# Altium PCB FPV0-3.PcbDoc (part 5 of 6)
Units mm, origin at the board's own origin, x right, y up, seen from the top; angles counter-clockwise.
Board outline 81.28 x 53.34 mm, 4 copper layers (Top Layer, GND Plane 1, 3v3 Plane 2, Bottom Layer); 178 components, 250 nets, 836 pads, 217 vias.
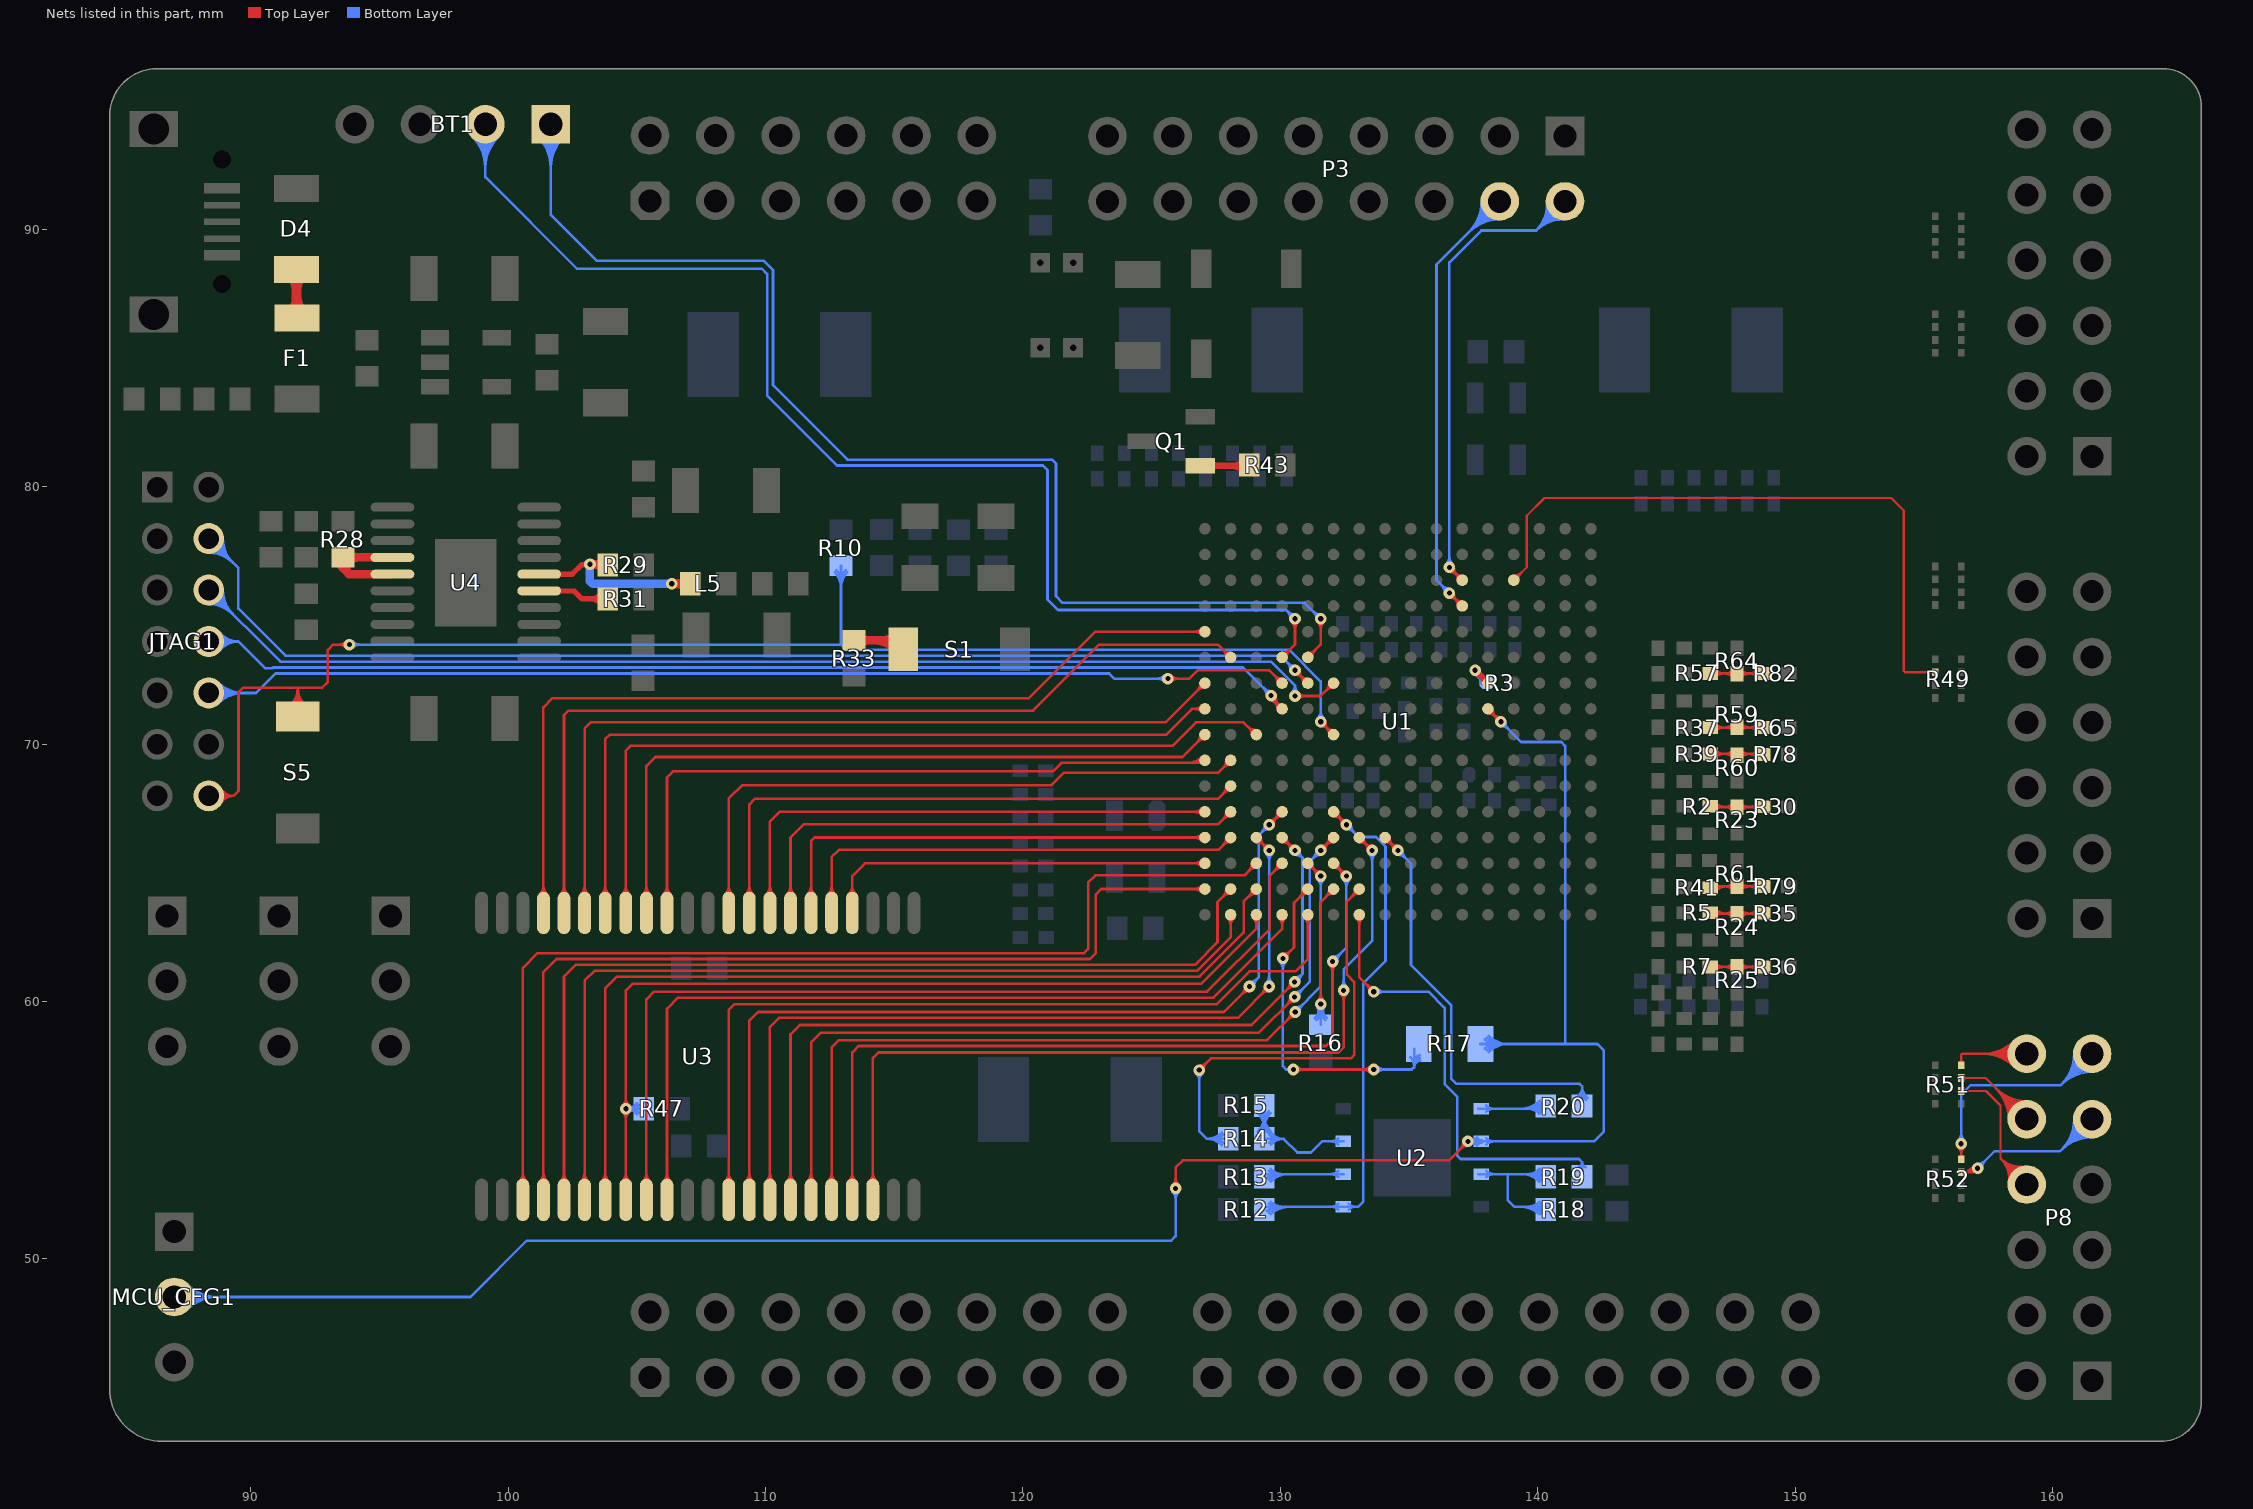
[diagram p7: the nets of this part, all layers, seen from the top]

## Via types
v1: diameter 0.45, hole 0.2, Top Layer to Bottom Layer, tented both sides, 150 vias
v2: diameter 0.55, hole 0.3, Top Layer to Bottom Layer, tented both sides, 55 vias
v3: diameter 0.45, hole 0.2, Top Layer to Bottom Layer, 6 vias
v4: diameter 0.666, hole 0.4, Top Layer to Bottom Layer, tented both sides, 4 vias
v5: diameter 0.513, hole 0.3, Top Layer to Bottom Layer, tented both sides, 1 vias
v6: diameter 0.55, hole 0.23, Top Layer to Bottom Layer, tented both sides, 1 vias

## Nets (pads, with @x,y where several pads share a name; then routed paths per layer and width w, separated by ;. In a path a pad name is that pad's centre, name@x,y a point inside that pad or via, vN(x,y) a via of type N, cw(c..) or ccw(c..) an arc to the next point about the centre after c; other vN are vias at no path point) (continued)
NetP8_8: P8.8 R51.3 | length 12.1
  Top Layer w0.089: R51.3@156.456,56.519 157.425,56.519 157.988,55.956 157.988,53.899 ; R51.3@156.513,56.462 cw(c156.65,56.325) 156.65,56.519 cw(c156.65,56.713) R51.3@156.513,56.576 ; P8.8@158.304,52.973 ccw(c157.203,53.114) 157.988,53.899 ; P8.8@158.392,52.961 ccw(c157.43,53.085) 158.116,53.771 ccw(c158.802,54.457) P8.8@158.926,53.494 ; P8.8@158.481,52.95 ccw(c157.657,53.056) 158.244,53.643 ccw(c158.831,54.23) P8.8@158.937,53.406 ; P8.8@158.569,52.939 ccw(c157.884,53.026) 158.372,53.515 ccw(c158.86,54.003) P8.8@158.948,53.318 ; P8.8@158.914,53.583 cw(c158.773,54.684) 157.988,53.899 ; P8.8@159.004,52.883 157.988,53.899
NetP8_9: P8.9 R52.5 | length 18.3
  Top Layer w0.089: R52.5@156.513,53.304 cw(c156.65,53.167) 156.65,53.361 cw(c156.65,53.556) R52.5@156.513,53.418 ; 156.625,53.361 ccw(c156.625,53.84) v1@157.019,53.57 ; 156.793,53.361 ccw(c156.793,53.724) v1@157.093,53.519 ; v1@156.946,53.62 cw(c156.456,53.955) R52.5@156.456,53.361 156.939,53.361 v1(157.095,53.518)
  Bottom Layer w0.089: v1(157.095,53.518) 157.755,54.178 160.299,54.178 P8.9@161.544,55.423 ; v1@157.095,53.698 ccw(c157.095,54.134) 157.403,53.826 ccw(c157.711,53.518) v1@157.276,53.518 ; P8.9@160.838,55.423 cw(c159.135,55.423) 160.34,54.218 cw(c161.544,53.014) P8.9@161.544,54.717 ; P8.9@160.927,55.423 cw(c159.439,55.423) 160.491,54.37 cw(c161.544,53.317) P8.9@161.544,54.806 ; P8.9@161.016,55.423 cw(c159.742,55.423) 160.643,54.522 cw(c161.544,53.621) P8.9@161.544,54.895 ; P8.9@161.105,55.423 cw(c160.046,55.423) 160.795,54.674 cw(c161.544,53.924) P8.9@161.544,54.984 ; P8.9@161.194,55.423 cw(c160.349,55.423) 160.947,54.825 cw(c161.544,54.228) P8.9@161.544,55.073
NetP8_10: P8.10 R51.5 | length 13.5
  Top Layer w0.089: R51.5@156.456,57.019 157.408,57.019 P8.10@159.004,55.423 ; R51.5@156.513,56.962 cw(c156.65,56.825) 156.65,57.019 cw(c156.65,57.213) R51.5@156.513,57.076 ; P8.10@158.298,55.423 ccw(c156.595,55.423) 157.8,56.627 ccw(c159.004,57.832) P8.10@159.004,56.128 ; P8.10@158.387,55.423 ccw(c156.899,55.423) 157.951,56.475 ccw(c159.004,57.528) P8.10@159.004,56.039 ; P8.10@158.476,55.423 ccw(c157.202,55.423) 158.103,56.324 ccw(c159.004,57.225) P8.10@159.004,55.951 ; P8.10@158.565,55.423 ccw(c157.506,55.423) 158.255,56.172 ccw(c159.004,56.921) P8.10@159.004,55.862 ; P8.10@158.654,55.423 ccw(c157.809,55.423) 158.407,56.02 ccw(c159.004,56.618) P8.10@159.004,55.773
NetP8_11: P8.11 R52.7 | length 19.9
  Top Layer w0.089: v1@156.328,54.338 cw(c156.02,54.03) 156.456,54.03 cw(c156.892,54.03) v1@156.584,54.338 ; R52.7@156.399,53.943 ccw(c156.262,54.081) 156.456,54.081 ccw(c156.65,54.081) R52.7@156.513,53.943 ; R52.7@156.456,53.861 v1(156.456,54.466)
  Bottom Layer w0.089: v1@156.328,54.593 ccw(c156.02,54.901) 156.456,54.901 ccw(c156.892,54.901) v1@156.584,54.593 ; v1(156.456,54.466) 156.456,56.38 156.82,56.744 160.325,56.744 P8.11@161.544,57.963 ; P8.11@160.838,57.963 cw(c159.135,57.963) 160.34,56.758 cw(c161.544,55.554) P8.11@161.544,57.257 ; P8.11@160.927,57.963 cw(c159.439,57.963) 160.491,56.91 cw(c161.544,55.857) P8.11@161.544,57.346 ; P8.11@161.016,57.963 cw(c159.742,57.963) 160.643,57.062 cw(c161.544,56.161) P8.11@161.544,57.435 ; P8.11@161.105,57.963 cw(c160.046,57.963) 160.795,57.214 cw(c161.544,56.464) P8.11@161.544,57.524 ; P8.11@161.194,57.963 cw(c160.349,57.963) 160.947,57.365 cw(c161.544,56.768) P8.11@161.544,57.613
NetP8_12: P8.12 R51.7 | length 13.3
  Top Layer w0.089: R51.7@156.399,57.601 ccw(c156.262,57.738) 156.456,57.738 ccw(c156.65,57.738) R51.7@156.513,57.601 ; R51.7@156.456,57.519 156.456,57.929 156.489,57.963 P8.12@159.004,57.963 ; P8.12@158.505,57.464 ccw(c157.301,56.259) 157.301,57.963 ccw(c157.301,59.666) P8.12@158.505,58.462 ; P8.12@158.568,57.527 ccw(c157.515,56.474) 157.515,57.963 ccw(c157.515,59.452) P8.12@158.568,58.399 ; P8.12@158.631,57.59 ccw(c157.73,56.689) 157.73,57.963 ccw(c157.73,59.237) P8.12@158.631,58.336 ; P8.12@158.694,57.652 ccw(c157.945,56.903) 157.945,57.963 ccw(c157.945,59.022) P8.12@158.694,58.273 ; P8.12@158.757,57.715 ccw(c158.159,57.118) 158.159,57.963 ccw(c158.159,58.808) P8.12@158.757,58.21
NetQ1_2: Q1.3 R43.1 | length 3.6
  Top Layer w0.254: Q1.3@126.88,80.813 R43.1@128.754,80.813 ; Q1.3@127.278,80.69 cw(c127.573,80.395) 127.573,80.813 cw(c127.573,81.23) Q1.3@127.278,80.935 ; 128.095,80.813 cw(c128.095,80.104) R43.1@128.596,80.605 ; 128.165,80.813 ccw(c128.165,81.423) R43.1@128.596,80.991
NetR2_2: R2.2 R23.2 R30.2 | length 5.5
  Top Layer w0.102: R2.2@146.736,67.548 R23.2@147.752,67.548 R30.2@148.75,67.548 ; R2.2@146.821,67.65 ccw(c147.069,67.898) 147.069,67.548 ; R2.2@146.893,67.441 cw(c147.153,67.181) 147.153,67.548 ; R2.2@146.893,67.722 ccw(c147.314,68.143) 147.314,67.548 ; R23.2@147.611,67.407 ccw(c147.271,67.067) 147.271,67.548 ccw(c147.271,68.029) R23.2@147.611,67.689 ; R23.2@147.893,67.407 cw(c148.233,67.067) 148.233,67.548 cw(c148.233,68.029) R23.2@147.893,67.689 ; 148.181,67.548 ccw(c148.181,68.084) R30.2@148.56,67.705 ; 148.258,67.548 cw(c148.258,67.122) R30.2@148.56,67.423 ; 148.426,67.548 ccw(c148.426,67.838) R30.2@148.631,67.633
NetR3_2: R3.2 U1.E7 | length 3
  Top Layer w0.254: v1@137.569,72.768 cw(c137.569,72.531) 137.736,72.699 cw(c137.904,72.866) v1@137.667,72.866 ; v1(137.569,72.866) U1.E7@138.069,72.366 ; U1.E7@137.971,72.366 ccw(c137.735,72.366) 137.902,72.533 ccw(c138.069,72.701) U1.E7@138.069,72.464
  Bottom Layer w0.254: v1@137.544,72.771 cw(c137.434,72.363) R3.2@137.8,72.574 ; v1(137.569,72.866) 137.569,72.853 R3.2@138.032,72.39 ; v1@137.667,72.866 ccw(c137.936,72.866) 137.746,72.676 ; 137.736,72.685 cw(c137.441,72.39) R3.2@137.859,72.39
NetR5_2: R5.2 R24.2 R35.2 | length 5.5
  Top Layer w0.102: R5.2@146.739,63.409 R24.2@147.752,63.409 R35.2@148.75,63.409 ; R5.2@146.821,63.515 ccw(c147.077,63.771) 147.077,63.409 ; R5.2@146.893,63.305 cw(c147.145,63.054) 147.145,63.409 ; R5.2@146.893,63.587 ccw(c147.322,64.016) 147.322,63.409 ; R24.2@147.611,63.269 ccw(c147.271,62.929) 147.271,63.409 ccw(c147.271,63.89) R24.2@147.611,63.55 ; R24.2@147.893,63.269 cw(c148.233,62.929) 148.233,63.409 cw(c148.233,63.89) R24.2@147.893,63.55 ; 148.185,63.409 ccw(c148.185,63.939) R35.2@148.56,63.565 ; 148.254,63.409 cw(c148.254,62.978) R35.2@148.56,63.283 ; 148.43,63.409 ccw(c148.43,63.694) R35.2@148.631,63.493
NetR7_2: R7.2 R25.2 R36.2 | length 5.1
  Top Layer w0.102: R7.2@146.702,61.341 R25.2@147.752,61.341 R36.2@148.742,61.341 ; R7.2@146.893,61.2 cw(c147.233,60.86) 147.233,61.341 cw(c147.233,61.822) R7.2@146.893,61.482 ; R25.2@147.611,61.2 ccw(c147.271,60.86) 147.271,61.341 ccw(c147.271,61.822) R25.2@147.611,61.482 ; R25.2@147.893,61.2 cw(c148.233,60.86) 148.233,61.341 cw(c148.233,61.822) R25.2@147.893,61.482 ; R36.2@148.56,61.2 ccw(c148.219,60.86) 148.219,61.341 ccw(c148.219,61.822) R36.2@148.56,61.482
NetR13_1: R13.1 U2.2 | length 6.4
  Bottom Layer w0.102: R13.1@129.376,53.289 U2.2@132.453,53.289 ; R13.1@129.48,53.134 cw(c129.853,52.761) 129.853,53.289 ; R13.1@129.551,53.063 cw(c130.099,52.515) 130.099,53.289 ; R13.1@129.551,53.413 ccw(c129.85,53.711) 129.85,53.289 ; R13.1@129.623,52.991 cw(c130.344,52.27) 130.344,53.289 ; R13.1@129.623,53.485 ccw(c130.095,53.956) 130.095,53.289 ; 131.957,53.289 cw(c131.957,52.869) U2.2@132.255,53.166 ; 131.957,53.289 ccw(c131.957,53.71) U2.2@132.255,53.412
NetR14_1: R14.1 R15.2 U2.3 | length 13.4
  Bottom Layer w0.102: R14.1@129.129,54.958 ccw(c128.533,55.554) 129.376,55.554 ccw(c130.219,55.554) R14.1@129.623,54.958 ; R15.2@129.129,55.659 cw(c128.533,55.063) 129.376,55.063 cw(c130.219,55.063) R15.2@129.623,55.659 ; R14.1@129.201,54.886 ccw(c128.779,55.309) 129.376,55.309 ; R15.2@129.201,55.731 cw(c128.779,55.308) 129.376,55.308 ; R14.1@129.228,55.027 ccw(c129.144,55.206) 129.337,55.247 ccw(c129.634,55.31) R14.1@129.514,55.032 ; R14.1@129.239,55.032 ccw(c129.119,55.31) 129.416,55.247 ccw(c129.609,55.206) R14.1@129.525,55.027 ; R14.1@129.271,54.935 ccw(c129.2,55.087) 129.364,55.122 ; R15.2@129.376,55.956 R14.1@129.376,54.661 130.124,54.661 ; 129.389,55.122 ccw(c129.553,55.087) R14.1@129.482,54.935 ; R14.1@129.551,54.886 cw(c129.974,55.309) 129.376,55.309 ; R15.2@129.551,55.731 ccw(c129.974,55.308) 129.376,55.308 ; R14.1@129.566,54.502 cw(c129.907,54.217) 129.907,54.661 cw(c129.907,55.105) R14.1@129.566,54.82 ; R14.1@129.644,54.437 cw(c130.124,54.035) 130.124,54.661 ; R14.1@129.644,54.885 ccw(c130.124,55.287) 130.124,54.661 ; U2.3@132.255,54.436 ccw(c131.957,54.139) 131.957,54.559 ccw(c131.957,54.98) U2.3@132.255,54.682 ; U2.3@132.453,54.559 131.623,54.559 131.191,54.127 130.658,54.127 130.124,54.661
NetR16_2: R16.2 U1.L15 | length 10.7
  Top Layer w0.102: v1@131.449,60.016 ccw(c131.151,60.314) 131.572,60.314 ccw(c131.993,60.314) v1@131.695,60.016 ; v1(131.572,59.893) 131.572,63.869 U1.L15@132.069,64.366 ; U1.L15@131.895,64.366 cw(c131.474,64.366) 131.772,64.069 cw(c132.069,63.771) U1.L15@132.069,64.192
  Bottom Layer w0.102: R16.2@131.335,59.351 ccw(c130.834,59.893) v1(131.572,59.893) ; R16.2@131.404,59.276 ccw(c131.048,59.661) 131.572,59.661 ccw(c132.096,59.661) R16.2@131.74,59.276 ; v1@131.428,59.796 cw(c131.152,59.61) 131.473,59.524 cw(c131.794,59.438) v1@131.648,59.737 ; v1@131.449,59.77 cw(c131.151,59.473) 131.572,59.473 cw(c131.993,59.473) v1@131.695,59.77 ; v1@131.496,59.737 cw(c131.35,59.438) 131.671,59.524 cw(c131.992,59.61) v1@131.716,59.796 ; R16.2@131.572,59.095 v1(131.572,59.893) ; R16.2@131.809,59.351 cw(c132.31,59.893) v1(131.572,59.893)
NetR17_2: R17.2 U1.M15 | length 19
  Top Layer w0.102: v1(130.099,61.671) 130.531,62.103 130.531,63.827 U1.M15@131.069,64.366 ; v1@130.099,61.845 ccw(c130.099,62.266) 130.396,61.969 ccw(c130.694,61.671) v1@130.273,61.671 ; v1(130.505,57.353) v1(133.629,57.353) ; v1@130.628,57.23 cw(c130.926,56.933) 130.926,57.353 cw(c130.926,57.774) v1@130.628,57.476 ; U1.M15@130.895,64.366 cw(c130.474,64.366) 130.772,64.069 cw(c131.069,63.771) U1.M15@131.069,64.192 ; v1@133.506,57.23 ccw(c133.209,56.933) 133.209,57.353 ccw(c133.209,57.774) v1@133.506,57.476
  Bottom Layer w0.102: v1@129.976,61.548 cw(c129.678,61.251) 130.099,61.251 cw(c130.519,61.251) v1@130.222,61.548 ; v1(130.099,61.671) 130.099,57.48 130.226,57.353 ; v1@130.349,57.277 ccw(c130.226,57.216) 130.226,57.353 ; v1@130.349,57.43 cw(c130.226,57.49) 130.226,57.353 ; v1(130.505,57.353) 130.226,57.353 ; v1(133.629,57.353) 135.103,57.353 135.198,57.449 R17.2@135.198,58.166 ; v1@133.753,57.23 cw(c134.05,56.933) 134.05,57.353 cw(c134.05,57.774) v1@133.753,57.476 ; R17.2@135.058,57.826 cw(c134.721,57.489) 135.198,57.489 ; 135.198,57.426 cw(c135.473,57.426) R17.2@135.436,57.699 ; 135.198,57.543 cw(c135.457,57.543) R17.2@135.422,57.799 ; R17.2@135.198,57.659 cw(c135.441,57.659) R17.2@135.409,57.9
NetR18_2: R18.2 R19.2 U2.7 | length 11.2
  Bottom Layer w0.102: U2.7@137.701,53.289 U2.7@137.803,53.289 138.836,53.289 ; U2.7@138.001,53.166 cw(c138.299,52.869) 138.299,53.289 cw(c138.299,53.71) U2.7@138.001,53.412 ; 139.353,52.019 cw(c139.353,51) R18.2@140.074,51.721 ; 139.353,53.289 cw(c139.353,52.27) R19.2@140.074,52.991 ; 139.598,52.019 cw(c139.598,51.245) R18.2@140.146,51.793 ; 139.598,53.289 cw(c139.598,52.515) R19.2@140.146,53.063 ; 139.602,52.019 ccw(c139.602,52.686) R18.2@140.074,52.215 ; 139.602,53.289 ccw(c139.602,53.956) R19.2@140.074,53.485 ; 139.844,52.019 cw(c139.844,51.491) R18.2@140.218,51.864 ; 139.844,53.289 cw(c139.844,52.761) R19.2@140.218,53.134 ; 139.848,52.019 ccw(c139.848,52.441) R18.2@140.146,52.143 ; 139.848,53.289 ccw(c139.848,53.711) R19.2@140.146,53.413 ; R18.2@140.321,52.019 139.09,52.019 138.836,52.273 138.836,53.289 ; R19.2@140.321,53.289 138.836,53.289
NetR20_2: R20.2 U2.5 | length 6
  Bottom Layer w0.102: U2.5@137.701,55.829 U2.5@137.803,55.829 R20.2@140.335,55.829 ; U2.5@138.001,55.706 cw(c138.299,55.409) 138.299,55.829 cw(c138.299,56.25) U2.5@138.001,55.952 ; 139.353,55.829 ccw(c139.353,56.848) R20.2@140.074,56.128 ; 139.598,55.829 ccw(c139.598,56.603) R20.2@140.146,56.056 ; 139.602,55.829 cw(c139.602,55.162) R20.2@140.074,55.634 ; 139.844,55.829 ccw(c139.844,56.358) R20.2@140.218,55.984 ; 139.848,55.829 cw(c139.848,55.408) R20.2@140.146,55.706
NetR28_1: R28.1 U4.4 U4.5 | length 6.8
  Top Layer w0.33: R28.1@93.452,77.052 cw(c93.32,76.835) 93.574,76.835 ; R28.1@93.553,77.317 ccw(c93.805,77.086) 93.564,76.845 ; R28.1@93.574,77.253 93.574,76.835 ; R28.1@93.575,77.251 U4.4@95.499,77.251 ; R28.1@93.696,77.052 ccw(c93.827,76.835) 93.574,76.835 ; R28.1@93.79,77.087 cw(c94.187,76.689) 94.187,77.251 ; R28.1@93.79,77.419 ccw(c94.194,77.823) 94.194,77.251 ; R28.1@93.797,77.094 ccw(c94.059,76.853) 93.807,76.601 ; U4.5@95.499,76.601 93.807,76.601 ; 93.574,76.835 93.807,76.601
NetR31_2: R31.2 U4.15 | length 4.2
  Top Layer w0.203: U4.15@101.199,75.951 102.56,75.951 102.87,75.641 R31.2@103.872,75.641 ; U4.15@101.926,75.899 cw(c102.051,75.774) 102.051,75.951 cw(c102.051,76.128) U4.15@101.926,76.003 ; R31.2@103.661,75.43 ccw(c103.151,74.921) 103.151,75.641 ccw(c103.151,76.362) R31.2@103.661,75.852
NetR33_2: R33.2 S1.2 | length 4
  Top Layer w0.33: R33.2@113.436,74.03 S1.2@114.997,74.03 ; R33.2@113.652,73.864 cw(c114.053,73.463) 114.053,74.03 cw(c114.053,74.597) R33.2@113.652,74.196 ; 114.184,74.03 cw(c114.184,72.803) S1.2@115.052,73.671 ; 114.519,74.03 ccw(c114.519,74.782) S1.2@115.052,74.25
NetR37_2: R37.2 R59.2 R65.2 | length 5.5
  Top Layer w0.102: R37.2@146.702,70.637 R65.2@148.75,70.637 ; R37.2@146.893,70.497 cw(c147.233,70.156) 147.233,70.637 cw(c147.233,71.118) R37.2@146.893,70.778 ; 147.236,70.637 ccw(c147.236,71.167) R59.2@147.611,70.793 ; 147.306,70.637 cw(c147.306,70.205) R59.2@147.611,70.511 ; 147.482,70.637 ccw(c147.482,70.922) R59.2@147.683,70.721 ; R59.2@147.821,70.721 ccw(c148.022,70.922) 148.022,70.637 ; R59.2@147.893,70.511 cw(c148.198,70.205) 148.198,70.637 ; R59.2@147.893,70.793 ccw(c148.267,71.167) 148.267,70.637 ; R65.2@148.56,70.497 ccw(c148.219,70.156) 148.219,70.637 ccw(c148.22,71.118) R65.2@148.56,70.778
NetR39_2: R39.2 R60.2 R78.2 | length 5.3
  Top Layer w0.102: R39.2@146.702,69.617 R78.2@148.75,69.617 ; R39.2@146.893,69.477 cw(c147.233,69.137) 147.233,69.617 cw(c147.233,70.098) R39.2@146.893,69.758 ; 147.263,69.617 ccw(c147.263,70.109) R60.2@147.611,69.761 ; 147.279,69.617 cw(c147.279,69.147) R60.2@147.611,69.48 ; R60.2@147.893,69.48 cw(c148.225,69.147) 148.225,69.617 ; R60.2@147.893,69.761 ccw(c148.24,70.109) 148.24,69.617 ; 148.168,69.617 cw(c148.168,69.063) R78.2@148.56,69.455 ; 148.271,69.617 ccw(c148.271,70.025) R78.2@148.56,69.737 ; 148.413,69.617 cw(c148.413,69.309) R78.2@148.631,69.527
NetR41_2: R41.2 R61.2 R79.2 | length 5.4
  Top Layer w0.102: R41.2@146.755,64.467 R61.2@147.752,64.467 R79.2@148.8,64.467 ; R41.2@146.821,64.345 cw(c147.115,64.052) 147.115,64.467 ; R41.2@146.893,64.274 cw(c147.36,63.807) 147.36,64.467 ; R41.2@146.893,64.555 ccw(c147.107,64.769) 147.107,64.467 ; R61.2@147.611,64.326 ccw(c147.271,63.986) 147.271,64.467 ccw(c147.271,64.948) R61.2@147.611,64.608 ; R61.2@147.893,64.326 cw(c148.233,63.986) 148.233,64.467 cw(c148.233,64.948) R61.2@147.893,64.608 ; 148.216,64.467 cw(c148.216,63.98) R79.2@148.56,64.324 ; 148.223,64.467 ccw(c148.223,64.942) R79.2@148.56,64.606
NetR57_2: R57.2 R64.2 R82.2 | length 5.5
  Top Layer w0.102: R57.2@146.702,72.746 R82.2@148.75,72.746 ; R57.2@146.893,72.605 cw(c147.233,72.265) 147.233,72.746 cw(c147.233,73.227) R57.2@146.893,72.886 ; 147.229,72.746 cw(c147.229,72.205) R64.2@147.611,72.587 ; 147.313,72.746 ccw(c147.313,73.167) R64.2@147.611,72.869 ; 147.474,72.746 cw(c147.474,72.451) R64.2@147.683,72.659 ; R64.2@147.821,72.659 cw(c148.029,72.451) 148.029,72.746 ; R64.2@147.893,72.587 cw(c148.275,72.205) 148.275,72.746 ; R64.2@147.893,72.869 ccw(c148.191,73.167) 148.191,72.746 ; R82.2@148.56,72.605 ccw(c148.219,72.265) 148.219,72.746 ccw(c148.22,73.226) R82.2@148.56,72.886
P_GOOD: L5.1 R29.2 U4.16 | length 12
  Top Layer w0.203: U4.16@101.199,76.601 102.484,76.601 102.845,76.962 ; U4.16@101.926,76.549 cw(c102.051,76.424) 102.051,76.601 cw(c102.051,76.778) U4.16@101.926,76.653 ; 102.938,76.962 cw(c102.938,76.751) v1@103.088,76.9 ; v1@103.082,77.069 cw(c102.845,77.279) 102.845,76.962 ; v1@103.236,76.881 cw(c103.333,76.713) 103.383,76.9 ; v1@103.244,77.09 ccw(c103.406,77.33) R29.2@103.481,77.05 ; v1@103.262,76.9 cw(c103.411,76.751) 103.411,76.962 ; v1@103.262,77.075 ccw(c103.534,77.347) R29.2@103.534,76.962 ; v1@103.282,76.926 cw(c103.485,76.808) 103.424,77.035 ; v1@103.282,77.049 ccw(c103.63,77.25) R29.2@103.526,76.862 ; R29.2@103.661,76.751 ccw(c103.151,76.242) 103.151,76.962 ccw(c103.151,77.682) R29.2@103.661,77.173 ; R29.2@103.872,76.962 102.845,76.962
  Top Layer w0.33: v1(106.35,76.225) L5.1@107.072,76.225 ; v1@106.38,76.174 cw(c106.521,75.929) 106.594,76.202 ; v1@106.38,76.277 ccw(c106.521,76.521) 106.594,76.249 ; L5.1@106.906,76.059 ccw(c106.505,75.658) 106.505,76.225 ccw(c106.505,76.792) L5.1@106.906,76.392
  Bottom Layer w0.33: v1(103.175,76.987) 103.175,76.327 103.276,76.225 v1(106.35,76.225)
PROG: JTAG1.14 R10.1 S5.2 U1.L9 | length 67.9
  Top Layer w0.102: JTAG1.14@88.36,67.985 89.321,67.985 ; JTAG1.14@88.658,67.809 cw(c88.965,67.628) 88.965,67.985 cw(c88.965,68.341) JTAG1.14@88.658,68.16 ; JTAG1.14@88.746,67.758 cw(c89.143,67.524) 89.143,67.985 cw(c89.143,68.445) JTAG1.14@88.746,68.212 ; JTAG1.14@88.833,67.706 cw(c89.321,67.419) 89.321,67.985 ; JTAG1.14@88.833,68.263 ccw(c89.321,68.55) 89.321,67.985 ; S5.2@91.493,71.478 ccw(c90.945,72.161) 91.821,72.161 ; S5.2@91.557,71.399 ccw(c91.115,71.95) 91.821,71.95 ccw(c92.527,71.95) S5.2@92.085,71.399 ; S5.2@91.62,71.32 ccw(c91.285,71.738) 91.821,71.738 ccw(c92.357,71.738) S5.2@92.022,71.32 ; S5.2@91.821,71.069 91.821,72.161 ; S5.2@92.149,71.478 cw(c92.697,72.161) 91.821,72.161 ; v1@93.704,73.74 ccw(c93.407,73.443) 93.407,73.863 ccw(c93.407,74.284) v1@93.704,73.986 ; v1(93.828,73.863) 93.193,73.863 92.989,73.66 92.989,72.415 92.761,72.187 89.687,72.187 89.517,72.017 89.517,68.181 89.321,67.985 ; v1@131.569,70.691 cw(c131.569,70.271) 131.866,70.568 cw(c132.164,70.866) v1@131.743,70.866 ; v1(131.569,70.866) U1.L9@132.068,70.366 ; 131.77,70.664 ccw(c132.069,70.963) U1.L9@132.069,70.54 ; 131.772,70.662 cw(c131.476,70.366) U1.L9@131.895,70.366
  Bottom Layer w0.102: v1(93.828,73.863) 112.928,73.863 ; v1@93.951,73.74 cw(c94.248,73.443) 94.248,73.863 cw(c94.248,74.284) v1@93.951,73.986 ; R10.1@112.681,76.675 cw(c112.085,76.079) 112.928,76.079 cw(c113.771,76.079) R10.1@113.175,76.675 ; R10.1@112.753,76.747 cw(c112.331,76.325) 112.928,76.325 cw(c113.526,76.325) R10.1@113.103,76.747 ; R10.1@112.928,76.922 112.928,73.863 ; v1@131.446,70.989 ccw(c131.148,71.286) 131.569,71.286 ccw(c131.989,71.286) v1@131.692,70.989 ; v1(131.569,70.866) 131.569,72.438 130.347,73.66 113.132,73.66 112.928,73.863
QEI_B1: R49.6 U1.D3 | length 26.3
  Top Layer w0.089: U1.D3@139.069,76.366 139.573,76.87 139.573,78.867 140.262,79.556 153.743,79.556 154.229,79.07 154.229,72.847 154.284,72.792 R49.6@155.456,72.792 ; U1.D3@139.069,76.547 ccw(c139.069,76.982) 139.377,76.674 ccw(c139.686,76.366) U1.D3@139.25,76.366 ; R49.6@155.399,72.735 ccw(c155.262,72.598) 155.262,72.792 ccw(c155.262,72.987) R49.6@155.399,72.849
QEI_B2: P3.4 U1.F4 | length 27.4
  Top Layer w0.102: v1@136.569,75.692 cw(c136.569,75.271) 136.867,75.568 cw(c137.163,75.866) v1@136.743,75.866 ; v1(136.569,75.866) U1.F4@137.069,75.366 ; U1.F4@136.895,75.366 ccw(c136.474,75.366) 136.772,75.663 ccw(c137.069,75.961) U1.F4@137.069,75.54
  Bottom Layer w0.102: v1@136.395,75.866 ccw(c135.974,75.866) 136.272,76.163 ccw(c136.569,76.461) v1@136.569,76.04 ; v1(136.569,75.866) 136.068,76.367 136.068,88.632 P3.4@138.522,91.086 ; P3.4@137.823,91.086 cw(c136.135,91.086) 137.328,89.892 cw(c138.522,88.698) P3.4@138.522,90.386 ; P3.4@137.924,91.086 cw(c136.481,91.086) 137.502,90.065 cw(c138.522,89.045) P3.4@138.522,90.488 ; P3.4@138.026,91.086 cw(c136.828,91.086) 137.675,90.239 cw(c138.522,89.392) P3.4@138.522,90.59 ; P3.4@138.127,91.086 cw(c137.175,91.086) 137.849,90.412 cw(c138.522,89.739) P3.4@138.522,90.691
QEI_B3: P3.2 U1.F3 | length 27.6
  Top Layer w0.102: v1@136.569,76.692 cw(c136.569,76.271) 136.867,76.568 ; v1(136.569,76.866) U1.F3@137.069,76.366 ; v1@136.743,76.866 ccw(c137.163,76.866) 136.866,76.569 ; U1.F3@136.895,76.366 ccw(c136.474,76.366) 136.772,76.663 ccw(c137.069,76.961) U1.F3@137.069,76.54
  Bottom Layer w0.102: v1@136.446,76.989 ccw(c136.148,77.287) 136.569,77.287 ccw(c136.99,77.287) v1@136.692,76.989 ; v1(136.569,76.866) 136.569,88.715 137.809,89.956 139.943,89.956 ; 140.104,90.117 ccw(c139.23,90.992) P3.2@140.465,91.055 ; 140.108,90.121 cw(c140.997,89.232) P3.2@141.041,90.488 ; 140.266,90.279 ccw(c139.537,91.007) P3.2@140.566,91.06 ; 140.273,90.286 cw(c141.008,89.551) P3.2@141.045,90.59 ; P3.2@140.364,91.05 cw(c138.922,90.976) 139.943,89.956 ; 140.428,90.44 ccw(c139.845,91.023) P3.2@140.668,91.065 ; 140.439,90.451 cw(c141.019,89.87) P3.2@141.048,90.691 ; P3.2@141.037,90.387 ccw(c140.986,88.912) 139.943,89.956 ; P3.2@141.067,91.08 139.943,89.956
QSPI_CS: R12.2 U1.L12 U2.1 | length 26.6
  Top Layer w0.102: U1.L12@132.069,67.192 cw(c132.069,66.773) 132.365,67.069 ; U1.L12@132.069,67.366 v1(132.569,66.866) ; U1.L12@132.243,67.366 ccw(c132.666,67.366) 132.367,67.067 ; v1@132.395,66.866 ccw(c131.974,66.866) 132.271,67.163 ccw(c132.569,67.46) v1@132.569,67.04
  Bottom Layer w0.102: R12.2@129.376,52.019 U2.1@132.453,52.019 133.02,52.019 133.223,52.222 133.223,60.706 134.087,61.57 134.087,66.015 133.712,66.389 133.045,66.389 v1(132.569,66.866) ; R12.2@129.48,51.864 cw(c129.853,51.491) 129.853,52.019 ; R12.2@129.551,51.793 cw(c130.099,51.245) 130.099,52.019 ; R12.2@129.551,52.143 ccw(c129.85,52.441) 129.85,52.019 ; R12.2@129.623,51.721 cw(c130.344,51) 130.344,52.019 ; R12.2@129.623,52.215 ccw(c130.095,52.686) 130.095,52.019 ; U2.1@132.255,51.896 ccw(c131.957,51.599) 131.957,52.019 ccw(c131.957,52.44) U2.1@132.255,52.142 ; v1@132.569,66.691 cw(c132.569,66.271) 132.866,66.568 cw(c133.164,66.866) v1@132.743,66.866 ; U2.1@132.651,51.896 cw(c132.949,51.599) 132.949,52.019 cw(c132.949,52.44) U2.1@132.651,52.142
QSPI_DQ0: R20.1 U1.J13 | length 20.2
  Top Layer w0.102: U1.J13@134.069,66.192 cw(c134.069,65.773) 134.365,66.069 ; U1.J13@134.069,66.366 v1(134.569,65.866) ; U1.J13@134.243,66.366 ccw(c134.666,66.366) 134.367,66.067 ; v1@134.395,65.866 ccw(c133.974,65.866) 134.271,66.163 ccw(c134.569,66.46) v1@134.569,66.04
  Bottom Layer w0.102: v1@134.569,65.691 cw(c134.569,65.271) 134.866,65.568 cw(c135.164,65.866) v1@134.743,65.866 ; v1(134.569,65.866) 135.076,65.359 135.076,61.419 136.641,59.854 136.641,57.009 136.855,56.794 141.63,56.794 141.732,56.693 ; R20.1@141.514,56.262 ccw(c141.198,56.693) 141.732,56.693 ; R20.1@141.574,56.18 ccw(c141.345,56.492) 141.732,56.492 ; R20.1@141.732,55.829 141.732,56.693 ; 141.732,56.479 ccw(c142.127,56.479) R20.1@141.877,56.173 ; R20.1@141.942,56.251 cw(c142.302,56.693) 141.732,56.693
QSPI_DQ2: R14.2 U1.K15 | length 20.8
  Top Layer w0.102: v1(126.848,57.328) 127.305,57.785 132.74,57.785 132.866,57.91 132.866,60.758 132.588,61.036 132.588,63.885 U1.K15@133.069,64.366 ; v1@126.848,57.502 ccw(c126.848,57.923) 127.145,57.625 ccw(c127.442,57.328) v1@127.022,57.328 ; U1.K15@132.895,64.366 cw(c132.474,64.366) 132.772,64.069 cw(c133.069,63.771) U1.K15@133.069,64.192
  Bottom Layer w0.102: v1@126.724,57.205 cw(c126.427,56.907) 126.848,56.907 cw(c127.268,56.907) v1@126.971,57.205 ; v1(126.848,57.328) 126.848,54.966 127.152,54.661 ; R14.2@127.725,54.418 ccw(c127.152,53.863) 127.152,54.661 ; R14.2@127.725,54.904 cw(c127.152,55.458) 127.152,54.661 ; R14.2@127.798,54.489 ccw(c127.392,54.095) 127.392,54.661 ccw(c127.392,55.226) R14.2@127.798,54.833 ; R14.2@127.976,54.661 127.152,54.661
QSPI_DQ3: R19.1 U1.K16 | length 20.2
  Top Layer w0.102: U1.K16@132.946,63.243 cw(c132.649,62.945) 133.069,62.945 cw(c133.49,62.945) U1.K16@133.192,63.243 ; U1.K16@133.069,63.366 133.069,60.936 v1(133.629,60.376) ; v1@133.455,60.376 ccw(c133.035,60.376) 133.332,60.673 ccw(c133.629,60.971) v1@133.629,60.55
  Bottom Layer w0.102: v1(133.629,60.376) 135.759,60.376 136.387,59.748 136.387,56.78 136.881,56.286 136.881,54 137.008,53.873 141.605,53.873 141.732,53.746 ; v1@133.753,60.253 cw(c134.05,59.955) 134.05,60.376 cw(c134.05,60.796) v1@133.753,60.499 ; R19.1@141.605,53.567 ccw(c141.542,53.746) 141.732,53.746 ; R19.1@141.721,53.188 141.732,53.199 141.732,53.746 ; R19.1@141.856,53.56 cw(c141.935,53.746) 141.732,53.746
QSPI_SCK: MCU_CFG1.2 R17.1 U1.E8 U2.6 | length 101.1
  Top Layer w0.102: v1@125.81,52.854 ccw(c125.513,53.151) 125.933,53.151 ccw(c126.354,53.151) v1@126.056,52.854 ; v1(125.933,52.73) 125.933,53.543 126.213,53.823 136.55,53.823 v1(137.287,54.559) ; v1@137.113,54.559 cw(c136.692,54.559) 136.99,54.262 cw(c137.287,53.964) v1@137.287,54.385 ; U1.E8@138.069,71.192 cw(c138.069,70.771) 138.367,71.069 cw(c138.664,71.366) U1.E8@138.243,71.366 ; U1.E8@138.069,71.366 v1(138.569,70.866) ; 138.271,71.164 cw(c137.972,70.866) v1@138.395,70.866 ; 138.273,71.162 ccw(c138.569,71.458) v1@138.569,71.04
  Bottom Layer w0.102: MCU_CFG1.2@87.02,48.514 98.527,48.514 100.711,50.698 125.755,50.698 125.933,50.876 v1(125.933,52.73) ; MCU_CFG1.2@87.299,48.235 cw(c87.973,47.562) 87.973,48.514 cw(c87.973,49.466) MCU_CFG1.2@87.299,48.793 ; MCU_CFG1.2@87.371,48.163 cw(c88.218,47.317) 88.218,48.514 cw(c88.218,49.711) MCU_CFG1.2@87.371,48.865 ; MCU_CFG1.2@87.443,48.091 cw(c88.463,47.071) 88.463,48.514 cw(c88.463,49.957) MCU_CFG1.2@87.443,48.937 ; MCU_CFG1.2@87.515,48.02 cw(c88.708,46.826) 88.708,48.514 cw(c88.708,50.202) MCU_CFG1.2@87.515,49.008 ; v1@125.81,52.607 cw(c125.513,52.31) 125.933,52.31 cw(c126.354,52.31) v1@126.056,52.607 ; R17.1@137.776,58.344 141.069,58.344 ; U2.6@137.803,54.559 142.189,54.559 142.57,54.94 142.57,58.09 142.316,58.344 141.069,58.344 ; R17.1@137.95,58.17 cw(c138.37,57.75) 138.37,58.344 cw(c138.37,58.938) R17.1@137.95,58.518 ; U2.6@138.001,54.436 cw(c138.299,54.139) 138.299,54.559 ; U2.6@138.001,54.682 ccw(c138.299,54.98) 138.299,54.559 ; R17.1@138.022,58.098 cw(c138.615,57.505) 138.615,58.344 cw(c138.615,59.183) R17.1@138.022,58.59 ; R17.1@138.093,58.026 cw(c138.86,57.259) 138.86,58.344 cw(c138.86,59.428) R17.1@138.093,58.661 ; v1@138.569,70.691 cw(c138.569,70.271) 138.866,70.568 cw(c139.164,70.866) v1@138.743,70.866 ; v1(138.569,70.866) 139.356,70.079 140.919,70.079 141.069,69.929 141.069,58.344
  Bottom Layer w0.203: v1(137.287,54.559) U2.6@137.803,54.559 ; v1@137.374,54.472 cw(c137.585,54.261) 137.585,54.559 cw(c137.585,54.857) v1@137.374,54.646 ; v1@137.388,54.489 cw(c137.486,54.421) U2.6@137.517,54.536 ; v1@137.388,54.63 ccw(c137.486,54.698) U2.6@137.517,54.583 ; U2.6@137.641,54.472 ccw(c137.43,54.261) 137.43,54.559 ccw(c137.43,54.857) U2.6@137.641,54.646
SRAM-A0: U1.P14 U3.3 | length 42.1
  Top Layer w0.102: U3.3@100.425,53.002 ccw(c100.085,53.342) 100.566,53.342 ccw(c101.047,53.342) U3.3@100.707,53.002 ; U3.3@100.566,52.286 100.566,61.297 101.143,61.874 122.37,61.874 122.53,62.034 122.53,64.618 122.809,64.897 128.6,64.897 U1.P14@129.069,65.366 ; U1.P14@128.895,65.366 cw(c128.474,65.366) 128.772,65.069 cw(c129.069,64.771) U1.P14@129.069,65.192
SRAM-A1: U1.T15 U3.4 | length 38.6
  Top Layer w0.102: U3.4@101.225,53.002 ccw(c100.885,53.342) 101.366,53.342 ccw(c101.847,53.342) U3.4@101.507,53.002 ; U3.4@101.366,52.286 101.366,61.132 101.879,61.646 122.606,61.646 122.834,61.874 122.834,64.16 123.04,64.366 U1.T15@127.069,64.366 ; U1.T15@126.946,64.243 ccw(c126.649,63.945) 126.649,64.366 ccw(c126.649,64.787) U1.T15@126.946,64.489
SRAM-A2: U1.R15 U3.5 | length 38.3
  Top Layer w0.102: U3.5@102.025,53.002 ccw(c101.685,53.342) 102.166,53.342 ccw(c102.647,53.342) U3.5@102.307,53.002 ; U3.5@102.166,52.286 102.166,60.967 102.616,61.417 126.677,61.417 127.559,62.299 127.559,63.856 U1.R15@128.069,64.366 ; U1.R15@127.895,64.366 cw(c127.474,64.366) 127.772,64.069 cw(c128.069,63.771) U1.R15@128.069,64.192
SRAM-A3: U1.R16 U3.6 | length 36.6
  Top Layer w0.102: U3.6@102.825,53.002 ccw(c102.485,53.342) 102.966,53.342 ccw(c103.447,53.342) U3.6@103.107,53.002 ; U3.6@102.966,52.286 102.966,60.802 103.353,61.189 126.771,61.189 128.069,62.486 U1.R16@128.069,63.366 ; U1.R16@127.946,63.243 cw(c127.649,62.945) 128.069,62.945 cw(c128.49,62.945) U1.R16@128.192,63.243
SRAM-A4: U1.P15 U3.7 | length 37.2
  Top Layer w0.102: U3.7@103.625,53.002 ccw(c103.285,53.342) 103.766,53.342 ccw(c104.247,53.342) U3.7@103.907,53.002 ; U3.7@103.766,52.286 103.766,60.51 104.216,60.96 126.866,60.96 128.575,62.669 128.575,63.872 U1.P15@129.069,64.366 ; U1.P15@128.895,64.366 cw(c128.474,64.366) 128.772,64.069 cw(c129.069,63.771) U1.P15@129.069,64.192
SRAM-A5: U1.N13 U3.16 | length 37
  Top Layer w0.102: U3.16@110.825,53.002 ccw(c110.485,53.342) 110.966,53.342 ccw(c111.447,53.342) U3.16@111.107,53.002 ; U3.16@110.966,52.286 110.966,58.718 111.328,59.08 128.88,59.08 v1(130.556,60.757) ; U1.N13@130.069,66.192 cw(c130.069,65.772) 130.366,66.069 ; U1.N13@130.069,66.366 v1(130.569,65.866) ; U1.N13@130.243,66.366 ccw(c130.665,66.366) 130.367,66.068 ; v1@130.382,60.757 cw(c129.961,60.757) 130.259,60.459 cw(c130.556,60.162) v1@130.556,60.583 ; v1@130.395,65.866 ccw(c129.974,65.866) 130.271,66.163 ccw(c130.569,66.461) v1@130.569,66.04
  Bottom Layer w0.102: v1(130.556,60.757) 130.861,61.062 130.861,65.574 ; v1@130.556,60.931 ccw(c130.556,61.352) 130.853,61.054 ccw(c131.151,60.757) v1@130.73,60.757 ; v1(130.569,65.866) 130.861,65.574 ; v1@130.571,65.692 cw(c130.576,65.29) 130.861,65.574 ; v1@130.743,65.864 ccw(c131.145,65.858) 130.861,65.574
SRAM-A6: U1.L13 U3.17 | length 36.5
  Top Layer w0.102: U3.17@111.625,53.002 ccw(c111.285,53.342) 111.766,53.342 ccw(c112.247,53.342) U3.17@111.907,53.002 ; U3.17@111.766,52.286 111.766,58.4 112.141,58.776 129.159,58.776 v1@130.581,60.198 ; v1@130.382,60.173 cw(c129.961,60.173) 130.259,59.875 cw(c130.556,59.578) v1@130.556,59.998 ; v1(131.569,65.866) U1.L13@132.069,66.366 ; v1@131.569,66.04 ccw(c131.569,66.46) 131.866,66.163 ccw(c132.164,65.866) v1@131.743,65.866 ; U1.L13@131.895,66.366 cw(c131.474,66.366) 131.772,66.069 cw(c132.069,65.771) U1.L13@132.069,66.192
  Bottom Layer w0.102: v1@130.556,60.347 ccw(c130.556,60.767) 130.853,60.47 ccw(c131.151,60.173) v1@130.73,60.173 ; v1@130.581,60.198 131.14,60.757 131.14,65.437 v1(131.569,65.866) ; v1@131.395,65.866 cw(c130.974,65.866) 131.271,65.568 cw(c131.569,65.271) v1@131.569,65.691
  other v1: 130.556,60.173
SRAM-A7: U1.M14 U3.18 | length 35
  Top Layer w0.102: U3.18@112.425,53.002 ccw(c112.085,53.342) 112.566,53.342 ccw(c113.047,53.342) U3.18@112.707,53.002 ; U3.18@112.566,52.286 112.566,58.21 112.852,58.496 129.489,58.496 v1(130.581,59.588) ; v1@130.407,59.588 cw(c129.987,59.588) 130.284,59.291 cw(c130.581,58.994) v1@130.581,59.414 ; U1.M14@131.069,65.192 cw(c131.069,64.773) 131.365,65.069 ; U1.M14@131.069,65.365 v1(131.569,64.866) ; U1.M14@131.243,65.366 ccw(c131.666,65.366) 131.367,65.067 ; v1@131.395,64.866 ccw(c130.974,64.866) 131.271,65.163 ccw(c131.569,65.46) v1@131.569,65.04
  Bottom Layer w0.102: v1(130.581,59.588) 131.569,60.576 v1(131.569,64.866) ; v1@130.581,59.763 ccw(c130.581,60.183) 130.879,59.886 ccw(c131.176,59.588) v1@130.756,59.588 ; v1@131.446,64.742 cw(c131.148,64.445) 131.569,64.445 cw(c131.989,64.445) v1@131.692,64.742
SRAM-A8: U1.L14 U3.19 | length 35.5
  Top Layer w0.102: U3.19@113.225,53.002 ccw(c112.885,53.342) 113.366,53.342 ccw(c113.847,53.342) U3.19@113.507,53.002 ; U3.19@113.366,52.769 113.366,58.019 113.614,58.268 131.775,58.268 132.029,58.522 v1(132.029,61.55) ; v1@131.906,61.427 cw(c131.609,61.13) 132.029,61.13 cw(c132.45,61.13) v1@132.152,61.427 ; U1.L14@132.069,65.192 cw(c132.069,64.771) 132.367,65.069 cw(c132.664,65.366) U1.L14@132.243,65.366 ; U1.L14@132.069,65.366 v1(132.569,64.866) ; 132.271,65.164 cw(c131.972,64.866) v1@132.395,64.866 ; 132.273,65.162 ccw(c132.569,65.458) v1@132.569,65.04
  Bottom Layer w0.102: v1(132.029,61.55) 132.569,62.09 v1(132.569,64.866) ; v1@132.029,61.725 ccw(c132.029,62.145) 132.327,61.848 ccw(c132.624,61.55) v1@132.203,61.55 ; v1@132.446,64.742 cw(c132.148,64.445) 132.569,64.445 cw(c132.989,64.445) v1@132.692,64.742
SRAM-A9: U1.K13 U3.20 | length 36.4
  Top Layer w0.102: U3.20@114.025,53.002 ccw(c113.685,53.342) 114.166,53.342 ccw(c114.647,53.342) U3.20@114.307,53.002 ; U3.20@114.166,52.769 114.166,57.803 114.376,58.014 132.258,58.014 132.461,58.217 v1(132.461,60.427) ; v1@132.338,60.303 cw(c132.04,60.006) 132.461,60.006 cw(c132.882,60.006) v1@132.584,60.303 ; U1.K13@133.069,66.192 cw(c133.069,65.773) 133.365,66.069 ; U1.K13@133.069,66.366 v1(133.569,65.866) ; U1.K13@133.243,66.366 ccw(c133.666,66.366) 133.367,66.067 ; v1@133.395,65.866 ccw(c132.974,65.866) 133.271,66.163 ccw(c133.569,66.46) v1@133.569,66.04
  Bottom Layer w0.102: v1@132.338,60.55 ccw(c132.04,60.847) 132.461,60.847 ccw(c132.882,60.847) v1@132.584,60.55 ; v1(132.461,60.427) 132.461,61.241 133.569,62.349 v1(133.569,65.866) ; v1@132.537,60.427 v1@132.563,60.452 ; v1@133.446,65.742 cw(c133.148,65.445) 133.569,65.445 cw(c133.989,65.445) v1@133.692,65.742
SRAM-A10: U1.T14 U3.26 | length 16.8
  Top Layer w0.102: U3.26@113.225,64.152 ccw(c112.885,64.492) 113.366,64.492 ccw(c113.847,64.492) U3.26@113.507,64.152 ; U3.26@113.366,63.436 113.366,64.877 113.855,65.366 U1.T14@127.069,65.366 ; U1.T14@126.946,65.243 ccw(c126.649,64.945) 126.649,65.366 ccw(c126.649,65.787) U1.T14@126.946,65.489
SRAM-A11: U1.R13 U3.27 | length 19.4
  Top Layer w0.102: U3.27@112.425,64.152 ccw(c112.085,64.492) 112.566,64.492 ccw(c113.047,64.492) U3.27@112.707,64.152 ; U3.27@112.566,63.436 112.566,65.601 112.852,65.888 127.591,65.888 U1.R13@128.069,66.366 ; U1.R13@127.895,66.366 cw(c127.474,66.366) 127.772,66.069 cw(c128.069,65.771) U1.R13@128.069,66.192
SRAM-A12: U1.T13 U3.28 | length 19.6
  Top Layer w0.102: U3.28@111.625,64.152 ccw(c111.285,64.492) 111.766,64.492 ccw(c112.247,64.492) U3.28@111.907,64.152 ; U3.28@111.766,63.436 111.766,66.224 111.908,66.366 U1.T13@127.069,66.366 ; U1.T13@126.946,66.243 ccw(c126.649,65.945) 126.649,66.366 ccw(c126.649,66.787) U1.T13@126.946,66.489
SRAM-A13: U1.R12 U3.29 | length 21.9
  Top Layer w0.102: U3.29@110.825,64.152 ccw(c110.485,64.492) 110.966,64.492 ccw(c111.447,64.492) U3.29@111.107,64.152 ; U3.29@110.966,63.436 110.966,66.363 111.481,66.878 127.581,66.878 U1.R12@128.069,67.366 ; U1.R12@127.895,67.366 cw(c127.474,67.366) 127.772,67.069 cw(c128.069,66.771) U1.R12@128.069,67.192
SRAM-A14: U1.T12 U3.30 | length 22
  Top Layer w0.102: U3.30@110.025,64.152 ccw(c109.685,64.492) 110.166,64.492 ccw(c110.647,64.492) U3.30@110.307,64.152 ; U3.30@110.166,63.436 110.166,66.986 110.546,67.366 U1.T12@127.069,67.366 ; U1.T12@126.946,67.243 ccw(c126.649,66.945) 126.649,67.366 ccw(c126.649,67.787) U1.T12@126.946,67.489
SRAM-A15: U1.T8 U3.38 | length 32
  Top Layer w0.102: U3.38@103.625,64.152 ccw(c103.285,64.492) 103.766,64.492 ccw(c104.247,64.492) U3.38@103.907,64.152 ; U3.38@103.766,63.436 103.766,70.187 103.937,70.358 125.552,70.358 126.56,71.366 U1.T8@127.069,71.366 ; U1.T8@126.946,71.243 ccw(c126.649,70.945) 126.649,71.366 ccw(c126.649,71.787) U1.T8@126.946,71.489
SRAM-A16: U1.T7 U3.39 | length 33.4
  Top Layer w0.102: U3.39@102.825,64.152 ccw(c102.485,64.492) 102.966,64.492 ccw(c103.447,64.492) U3.39@103.107,64.152 ; U3.39@102.966,63.436 102.966,70.606 103.2,70.841 125.544,70.841 U1.T7@127.069,72.366 ; U1.T7@126.895,72.366 cw(c126.474,72.366) 126.772,72.069 cw(c127.069,71.771) U1.T7@127.069,72.192
SRAM-A17: U1.R6 U3.40 | length 36.3
  Top Layer w0.102: U3.40@102.025,64.152 ccw(c101.685,64.492) 102.166,64.492 ccw(c102.647,64.492) U3.40@102.307,64.152 ; U3.40@102.166,63.436 102.166,71.127 102.337,71.298 120.396,71.298 122.961,73.863 127.572,73.863 U1.R6@128.069,73.366 ; U1.R6@127.895,73.366 ccw(c127.474,73.366) 127.772,73.663 ccw(c128.069,73.961) U1.R6@128.069,73.54
SRAM-A18: U1.T5 U3.41 | length 36.3
  Top Layer w0.102: U3.41@101.225,64.152 ccw(c100.885,64.492) 101.366,64.492 ccw(c101.847,64.492) U3.41@101.507,64.152 ; U3.41@101.366,63.436 101.366,71.419 101.727,71.78 120.225,71.78 122.811,74.366 U1.T5@127.069,74.366 ; U1.T5@126.946,74.243 ccw(c126.649,73.945) 126.649,74.366 ccw(c126.649,74.787) U1.T5@126.946,74.489
SRAM-CE: R47.1 U1.P16 U3.8 | length 41.2
  Top Layer w0.102: U3.8@104.425,53.002 ccw(c104.085,53.342) 104.566,53.342 ccw(c105.047,53.342) U3.8@104.707,53.002 ; v1@104.449,55.706 cw(c104.166,55.423) 104.566,55.423 ; v1@104.449,55.952 ccw(c104.166,56.235) 104.566,56.235 ; U3.8@104.566,52.286 104.566,60.421 104.826,60.681 126.91,60.681 129.069,62.84 U1.P16@129.069,63.366 ; 104.566,55.394 cw(c105.007,55.394) v1@104.695,55.706 ; 104.566,56.264 ccw(c105.007,56.264) v1@104.695,55.952 ; U1.P16@128.946,63.243 cw(c128.649,62.945) 129.069,62.945 cw(c129.49,62.945) U1.P16@129.192,63.243
  Bottom Layer w0.102: v1@104.695,55.706 cw(c104.992,55.409) 104.992,55.829 cw(c104.992,56.25) v1@104.695,55.952 ; v1@104.707,55.719 cw(c104.801,55.642) 104.832,55.759 cw(c104.864,55.877) v1@104.744,55.857 ; v1@104.707,55.939 ccw(c104.801,56.016) 104.832,55.899 ccw(c104.864,55.781) v1@104.744,55.801 ; R47.1@104.869,55.804 cw(c104.932,56.037) 104.723,55.916 ccw(c104.837,55.983) R47.1@104.871,55.855 ; R47.1@104.869,55.855 ccw(c104.932,55.621) 104.723,55.742 cw(c104.837,55.675) R47.1@104.871,55.803 ; R47.1@104.989,55.62 ccw(c104.572,55.308) v1(104.572,55.829) ; R47.1@104.989,56.038 cw(c104.572,56.35) v1(104.572,55.829) ; R47.1@105.07,55.681 ccw(c104.775,55.46) 104.775,55.829 ccw(c104.775,56.199) R47.1@105.07,55.977 ; R47.1@105.269,55.829 v1(104.572,55.829)
SRAM-DQ0: U1.N14 U3.9 | length 37.3
  Top Layer w0.102: U3.9@105.225,53.002 ccw(c104.885,53.342) 105.366,53.342 ccw(c105.847,53.342) U3.9@105.507,53.002 ; U3.9@105.366,52.286 105.366,60.078 105.664,60.376 127.152,60.376 129.591,62.814 129.591,64.888 U1.N14@130.069,65.366 ; U1.N14@129.895,65.366 cw(c129.474,65.366) 129.772,65.069 cw(c130.069,64.771) U1.N14@130.069,65.192
SRAM-DQ1: U1.N16 U3.10 | length 34.6
  Top Layer w0.102: U3.10@106.025,53.002 ccw(c105.685,53.342) 106.166,53.342 ccw(c106.647,53.342) U3.10@106.307,53.002 ; U3.10@106.166,52.286 106.166,59.709 106.604,60.147 127.406,60.147 130.069,62.81 U1.N16@130.069,63.366 ; U1.N16@129.946,63.243 cw(c129.649,62.945) 130.069,62.945 cw(c130.49,62.945) U1.N16@130.192,63.243
SRAM-DQ2: U1.M16 U3.13 | length 33.8
  Top Layer w0.102: U3.13@108.425,53.002 ccw(c108.085,53.342) 108.566,53.342 ccw(c109.047,53.342) U3.13@108.707,53.002 ; U3.13@108.566,52.286 108.566,59.671 108.788,59.893 127.533,59.893 128.803,61.163 130.581,61.163 131.069,61.651 U1.M16@131.069,63.366 ; U1.M16@130.946,63.243 cw(c130.649,62.945) 131.069,62.945 cw(c131.49,62.945) U1.M16@131.192,63.243
SRAM-DQ3: U1.N12 U3.14 | length 38.3
  Top Layer w0.102: U3.14@109.225,53.002 ccw(c108.885,53.342) 109.366,53.342 ccw(c109.847,53.342) U3.14@109.507,53.002 ; U3.14@109.366,52.286 109.366,59.252 109.703,59.588 127.813,59.588 v1(128.803,60.579) ; v1@128.629,60.579 cw(c128.209,60.579) 128.506,60.282 cw(c128.803,59.984) v1@128.803,60.405 ; v1(129.569,66.866) U1.N12@130.069,67.366 ; v1@129.569,67.04 ccw(c129.569,67.461) 129.867,67.163 ccw(c130.164,66.866) v1@129.743,66.866 ; U1.N12@129.895,67.366 cw(c129.474,67.366) 129.772,67.069 cw(c130.069,66.771) U1.N12@130.069,67.192
  Bottom Layer w0.102: v1(128.803,60.579) 129.159,60.935 129.159,63.043 129.164,63.048 129.164,66.461 v1(129.569,66.866) ; v1@128.803,60.753 ccw(c128.803,61.174) 129.101,60.876 ccw(c129.398,60.579) v1@128.978,60.579 ; v1@129.395,66.866 cw(c128.974,66.866) 129.272,66.569 cw(c129.569,66.271) v1@129.569,66.692
SRAM-DQ4: U1.R11 U3.31 | length 24.6
  Top Layer w0.102: U3.31@109.225,64.152 ccw(c108.885,64.492) 109.366,64.492 ccw(c109.847,64.492) U3.31@109.507,64.152 ; U3.31@109.366,63.436 109.366,67.659 109.576,67.869 127.572,67.869 U1.R11@128.069,68.366 ; U1.R11@127.895,68.366 cw(c127.474,68.366) 127.772,68.069 cw(c128.069,67.771) U1.R11@128.069,68.192
SRAM-DQ5: U1.R10 U3.32 | length 26
  Top Layer w0.102: U3.32@108.425,64.152 ccw(c108.085,64.492) 108.566,64.492 ccw(c109.047,64.492) U3.32@108.707,64.152 ; U3.32@108.566,63.436 108.566,67.875 109.093,68.402 121.107,68.402 121.59,68.885 127.588,68.885 U1.R10@128.069,69.366 ; U1.R10@127.895,69.366 cw(c127.474,69.366) 127.772,69.069 cw(c128.069,68.771) U1.R10@128.069,69.192
SRAM-DQ6: U1.T10 U3.35 | length 28.2
  Top Layer w0.102: U3.35@106.025,64.152 ccw(c105.685,64.492) 106.166,64.492 ccw(c106.647,64.492) U3.35@106.307,64.152 ; U3.35@106.166,63.436 106.166,68.701 106.401,68.936 121.158,68.936 121.488,69.266 126.969,69.266 U1.T10@127.069,69.366 ; 126.407,69.266 ccw(c126.407,70.028) U1.T10@126.946,69.489 ; 126.652,69.266 ccw(c126.652,69.783) U1.T10@127.018,69.417
SRAM-DQ7: U1.T9 U3.36 | length 29.3
  Top Layer w0.102: U3.36@105.225,64.152 ccw(c104.885,64.492) 105.366,64.492 ccw(c105.847,64.492) U3.36@105.507,64.152 ; U3.36@105.366,63.436 105.366,69.145 105.715,69.494 126.198,69.494 U1.T9@127.069,70.366 ; U1.T9@126.895,70.366 cw(c126.474,70.366) 126.772,70.069 cw(c127.069,69.771) U1.T9@127.069,70.192
SRAM-OE: U1.P9 U3.37 | length 32.9
  Top Layer w0.102: U3.37@104.425,64.152 ccw(c104.085,64.492) 104.566,64.492 ccw(c105.047,64.492) U3.37@104.707,64.152 ; U3.37@104.566,63.436 104.566,69.742 104.75,69.926 125.806,69.926 126.721,70.841 128.575,70.841 129.049,70.366 U1.P9@129.069,70.366 ; 128.738,70.677 ccw(c129.069,71.009) U1.P9@129.069,70.54 ; 128.786,70.63 cw(c128.522,70.366) U1.P9@128.895,70.366
SRAM-WE: U1.P13 U3.15 | length 36.8
  Top Layer w0.102: U3.15@110.025,53.002 ccw(c109.685,53.342) 110.166,53.342 ccw(c110.647,53.342) U3.15@110.307,53.002 ; U3.15@110.166,52.286 110.166,59.01 110.515,59.36 128.346,59.36 v1(129.565,60.579) ; U1.P13@129.069,66.192 cw(c129.069,65.772) 129.366,66.069 ; U1.P13@129.069,66.366 v1(129.569,65.866) ; U1.P13@129.243,66.366 ccw(c129.665,66.366) 129.367,66.068 ; v1@129.391,60.579 cw(c128.971,60.579) 129.268,60.282 cw(c129.565,59.984) v1@129.565,60.405 ; v1@129.395,65.866 ccw(c128.974,65.866) 129.271,66.163 ccw(c129.569,66.461) v1@129.569,66.04
  Bottom Layer w0.102: v1@129.442,60.702 ccw(c129.145,61) 129.566,61 ccw(c129.986,60.999) v1@129.689,60.702 ; v1@129.446,65.743 cw(c129.148,65.446) 129.569,65.445 cw(c129.989,65.445) v1@129.692,65.743 ; v1(129.565,60.579) v1(129.569,65.866)
TCK: JTAG1.6 U1.L7 | length 52.9
  Top Layer w0.102: v1(130.569,71.866) 131.569,71.866 U1.L7@132.069,72.366 ; v1@130.692,71.743 cw(c130.989,71.445) 130.989,71.866 cw(c130.989,72.287) v1@130.692,71.989 ; U1.L7@131.895,72.366 cw(c131.474,72.366) 131.772,72.069 cw(c132.069,71.771) U1.L7@132.069,72.192
  Bottom Layer w0.102: JTAG1.6@88.36,75.435 cw(c88.36,74.11) 89.298,75.047 cw(c90.235,75.985) JTAG1.6@88.909,75.985 ; JTAG1.6@88.36,75.537 cw(c88.36,74.456) 89.124,75.221 cw(c89.888,75.985) JTAG1.6@88.808,75.985 ; JTAG1.6@88.36,75.639 cw(c88.36,74.803) 88.951,75.394 cw(c89.541,75.985) JTAG1.6@88.706,75.985 ; JTAG1.6@88.36,75.985 91.142,73.203 129.642,73.203 130.569,72.276 ; v1@130.448,71.991 ccw(c130.174,72.276) 130.569,72.276 ; v1(130.569,71.866) 130.569,72.276 ; v1@130.69,71.991 cw(c130.963,72.276) 130.569,72.276
TDI_FPGA: JTAG1.10 U1.N7 | length 49.5
  Top Layer w0.102: v1(125.628,72.542) 126.467,72.542 126.797,72.873 129.563,72.873 U1.N7@130.069,72.366 U1.N7@130.049,72.366 ; v1@125.752,72.419 cw(c126.049,72.122) 126.049,72.542 cw(c126.049,72.963) v1@125.752,72.666 ; U1.N7@129.895,72.366 ccw(c129.474,72.366) 129.772,72.663 ccw(c130.069,72.961) U1.N7@130.069,72.54
  Bottom Layer w0.102: JTAG1.10@88.36,71.985 90.196,71.985 90.953,72.741 123.347,72.741 123.546,72.542 v1(125.628,72.542) ; JTAG1.10@88.605,71.74 cw(c89.195,71.149) 89.195,71.985 cw(c89.195,72.82) JTAG1.10@88.605,72.229 ; JTAG1.10@88.677,71.668 cw(c89.441,70.904) 89.441,71.985 cw(c89.441,73.065) JTAG1.10@88.677,72.301 ; JTAG1.10@88.748,71.596 cw(c89.686,70.659) 89.686,71.985 cw(c89.686,73.31) JTAG1.10@88.748,72.373 ; v1@125.505,72.419 ccw(c125.208,72.122) 125.208,72.542 ccw(c125.208,72.963) v1@125.505,72.666
TDO_FPGA: JTAG1.8 U1.N8 | length 50.5
  Top Layer w0.102: v1@129.597,71.714 cw(c129.485,71.296) 129.859,71.512 ; v1@129.642,71.708 cw(c129.642,71.501) 129.788,71.647 ; v1(129.642,71.882) 129.642,71.794 U1.N8@130.069,71.366 ; v1@129.67,71.71 cw(c129.686,71.612) 129.773,71.662 cw(c129.863,71.714) v1@129.78,71.776 ; v1@129.714,71.881 ccw(c130.029,71.878) 129.872,71.606 ; v1@129.714,71.882 ccw(c130.103,71.882) 129.828,71.607 ; v1@129.81,71.837 ccw(c130.205,71.731) 129.851,71.527 ; v1@129.816,71.882 ccw(c130.45,71.882) U1.N8@130.001,71.434 ; U1.N8@129.895,71.366 ccw(c129.474,71.366) 129.772,71.663 ccw(c130.069,71.961) U1.N8@130.069,71.54
  Bottom Layer w0.102: JTAG1.8@88.36,73.985 89.515,73.985 ; JTAG1.8@88.628,73.766 cw(c89.088,73.392) 89.088,73.985 cw(c89.088,74.577) JTAG1.8@88.628,74.203 ; JTAG1.8@88.707,73.702 cw(c89.301,73.218) 89.301,73.985 cw(c89.301,74.751) JTAG1.8@88.707,74.267 ; JTAG1.8@88.786,73.638 cw(c89.515,73.044) 89.515,73.985 ; JTAG1.8@88.786,74.331 ccw(c89.515,74.925) 89.515,73.985 ; v1@129.467,71.882 ccw(c129.047,71.882) 129.344,72.179 ccw(c129.642,72.477) v1@129.642,72.056 ; v1(129.642,71.882) 128.549,72.974 90.863,72.974 90.837,72.949 90.551,72.949 89.515,73.985
TMS: JTAG1.4 U1.M7 | length 53
  Top Layer w0.102: v1@130.569,72.691 cw(c130.569,72.271) 130.866,72.568 cw(c131.164,72.866) v1@130.743,72.866 ; v1(130.569,72.866) U1.M7@131.069,72.366 ; 130.771,72.664 ccw(c131.069,72.962) U1.M7@131.069,72.54 ; 130.772,72.662 cw(c130.476,72.366) U1.M7@130.895,72.366
  Bottom Layer w0.102: JTAG1.4@88.36,77.435 cw(c88.36,76.11) 89.298,77.047 cw(c90.235,77.985) JTAG1.4@88.909,77.985 ; JTAG1.4@88.36,77.537 cw(c88.36,76.456) 89.124,77.22 cw(c89.888,77.985) JTAG1.4@88.808,77.985 ; JTAG1.4@88.36,77.639 cw(c88.36,76.803) 88.951,77.394 cw(c89.541,77.985) JTAG1.4@88.706,77.985 ; JTAG1.4@88.36,77.985 89.511,76.834 89.511,75.259 91.338,73.431 130.003,73.431 v1(130.569,72.866) ; v1@130.395,72.866 ccw(c129.974,72.866) 130.272,73.163 ccw(c130.569,73.46) v1@130.569,73.04
UART_RX: BT1.2 U1.N6 | length 58.3
  Top Layer w0.102: U1.N6@130.069,73.366 130.569,73.866 v1(130.569,74.866) ; U1.N6@130.069,73.54 ccw(c130.069,73.961) 130.367,73.663 ccw(c130.664,73.366) U1.N6@130.243,73.366 ; v1@130.446,74.742 cw(c130.148,74.445) 130.569,74.445 cw(c130.989,74.445) v1@130.692,74.742
  Bottom Layer w0.102: BT1.2@98.616,93.587 cw(c97.423,92.394) 99.111,92.394 cw(c100.799,92.394) BT1.2@99.605,93.587 ; BT1.2@98.688,93.659 cw(c97.668,92.639) 99.111,92.639 cw(c100.554,92.639) BT1.2@99.533,93.659 ; BT1.2@98.76,93.731 cw(c97.913,92.884) 99.111,92.884 cw(c100.308,92.884) BT1.2@99.462,93.731 ; BT1.2@98.832,93.803 cw(c98.159,93.129) 99.111,93.129 cw(c100.063,93.129) BT1.2@99.39,93.803 ; BT1.2@99.111,94.082 99.111,92.024 102.667,88.468 109.855,88.468 110.058,88.265 110.058,83.541 112.776,80.823 120.777,80.823 120.955,80.645 120.955,75.62 121.365,75.209 130.225,75.209 v1(130.569,74.866) ; v1@130.395,74.866 ccw(c129.974,74.866) 130.271,75.163 ccw(c130.569,75.46) v1@130.569,75.04
UART_TX: BT1.1 U1.M6 | length 57.6
  Top Layer w0.102: U1.M6@131.069,73.366 131.569,73.866 v1(131.569,74.866) ; U1.M6@131.069,73.54 ccw(c131.069,73.961) 131.367,73.663 ccw(c131.664,73.366) U1.M6@131.243,73.366 ; v1@131.446,74.742 cw(c131.148,74.445) 131.569,74.445 cw(c131.989,74.445) v1@131.692,74.742
  Bottom Layer w0.102: BT1.1@101.156,93.587 cw(c99.963,92.394) 101.651,92.394 cw(c103.339,92.394) BT1.1@102.145,93.587 ; BT1.1@101.228,93.659 cw(c100.208,92.639) 101.651,92.639 cw(c103.094,92.639) BT1.1@102.073,93.659 ; BT1.1@101.3,93.731 cw(c100.453,92.884) 101.651,92.884 cw(c102.848,92.884) BT1.1@102.002,93.731 ; BT1.1@101.372,93.803 cw(c100.699,93.129) 101.651,93.129 cw(c102.603,93.129) BT1.1@101.93,93.803 ; BT1.1@101.651,94.082 101.651,90.566 103.444,88.773 109.931,88.773 110.287,88.417 110.287,83.947 113.182,81.051 121.133,81.051 121.285,80.899 121.285,75.743 121.539,75.489 130.946,75.489 v1(131.569,74.866) ; v1@131.395,74.866 ccw(c130.974,74.866) 131.271,75.163 ccw(c131.569,75.46) v1@131.569,75.04
VBUS: D4.2 F1.2 | length 4.4
  Top Layer w0.381: D4.2@91.534,88.206 cw(c90.963,87.635) 91.77,87.635 cw(c92.578,87.635) D4.2@92.007,88.206 ; F1.2@91.559,86.8 ccw(c91.049,87.31) 91.77,87.31 ; F1.2@91.77,86.589 D4.2@91.77,88.443 ; 91.77,87.432 ccw(c92.664,87.432) F1.2@92.032,86.8